# EAGLE board MOL-v1.2b (EAGLE 8.2.2)
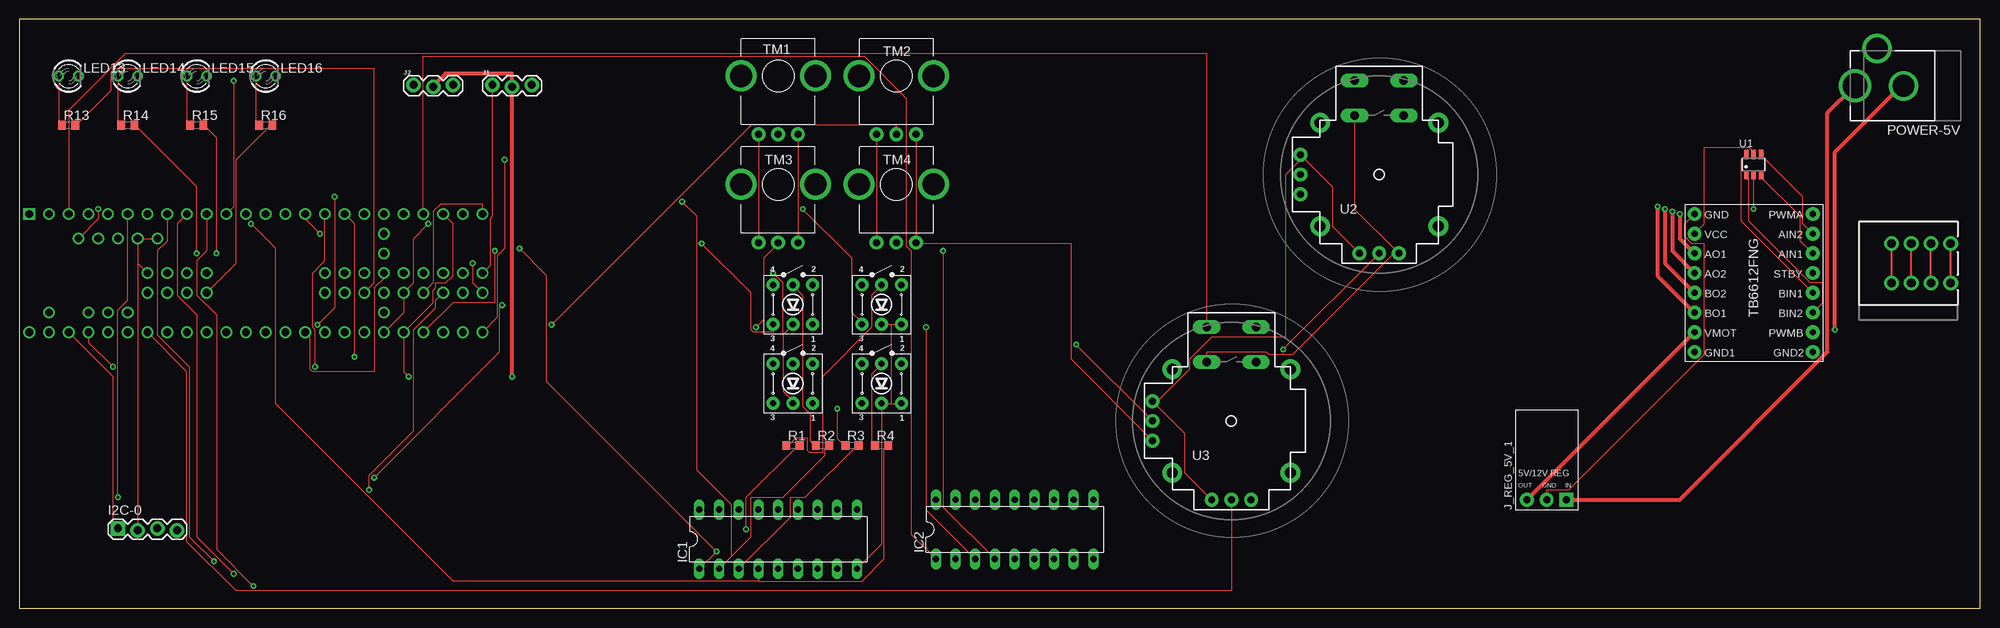
[diagram p0: board, top side]
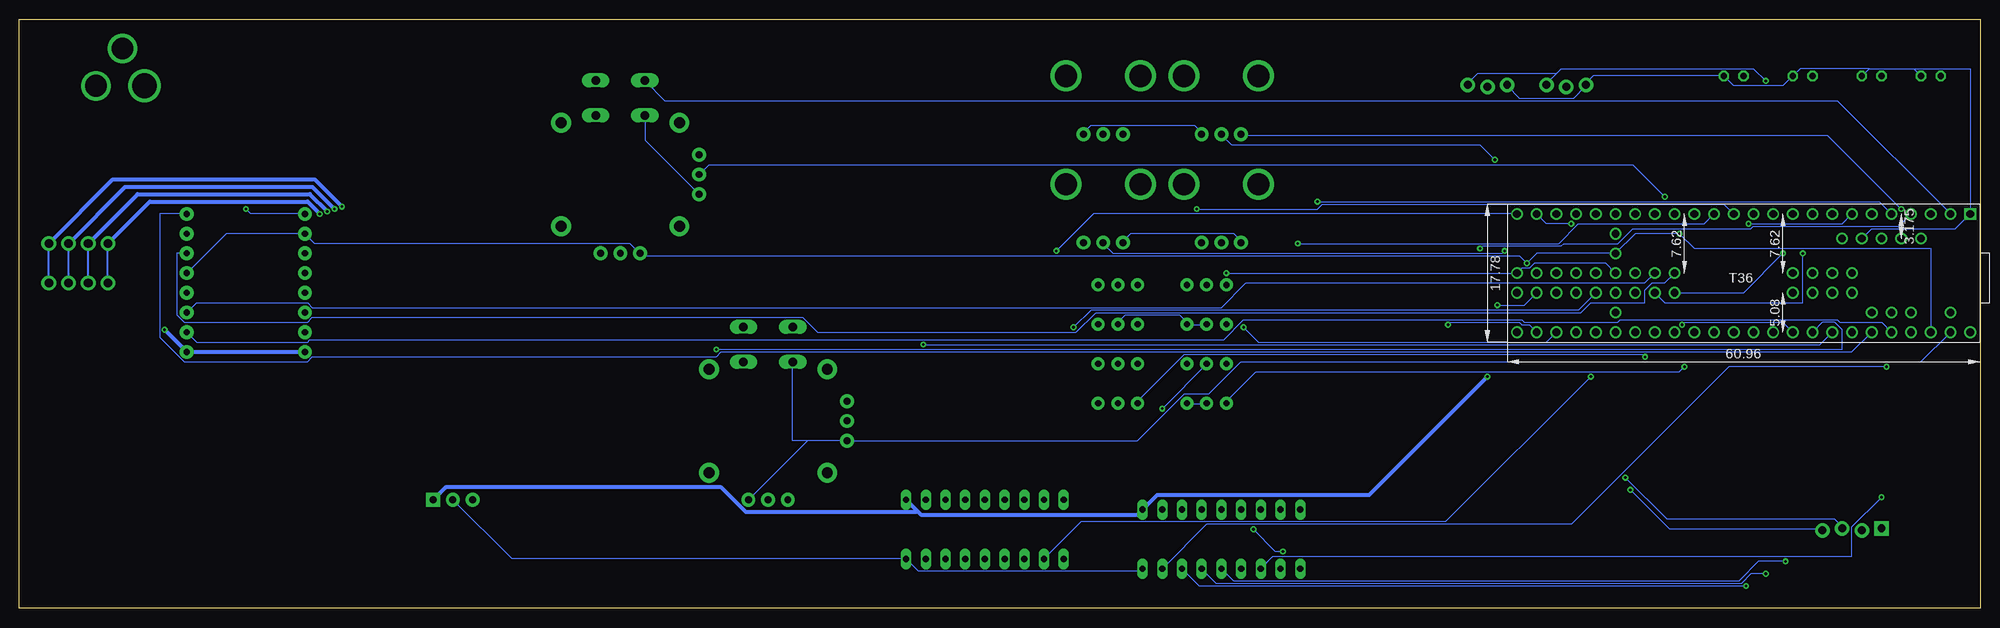
[diagram p1: board, bottom side, seen from below]

Size 252.71 x 75.87 mm. Coordinates in mm from the lower left corner, seen from the top.
Outline: 0,0 252.71,0 252.71,75.87 0,75.87 0,0
Copper layers (1*16): Top 0.035mm / dielectric 1.5mm / Bottom 0.035mm
Design rules "default": minimum track width 6mil, minimum drill 0.35mm, track to track 6mil, track to pad 6mil, pad to pad 6mil, via to via 6mil, smd to smd 6mil, copper to edge 40mil, drill to drill 6mil, minimum pad ring 10mil, minimum via ring 8mil, stop-mask expansion 4mil, vias tented up to drill 0mil, thermal gap 10mil
Net classes: 2 Power: width 0.508 mm, clearance 0.152 mm

## Footprints (pad centres in the part's own frame; a part is rotated, then mirrored left to right if it is on the bottom)
1X04_LOCK = drill 1.016 pad 1.88 square: 1 0,0.127 | drill 1.016 pad 1.88: 2 2.54,-0.127; 3 5.08,0.127; 4 7.62,-0.127
DIL18 = drill 0.813 long: 1 -10.16,-3.81; 2 -7.62,-3.81; 3 -5.08,-3.81; 4 -2.54,-3.81; 5 0,-3.81; 6 2.54,-3.81; 7 5.08,-3.81; 8 7.62,-3.81; 9 10.16,-3.81; 10 10.16,3.81; 11 7.62,3.81; 12 5.08,3.81; 13 2.54,3.81; 14 0,3.81; 15 -2.54,3.81; 16 -5.08,3.81; 17 -7.62,3.81; 18 -10.16,3.81
1X03_LOCK = drill 1.016 pad 1.88: 1 0,0.127; 2 2.54,-0.127; 3 5.08,0.127
POLOLU_5V-12V_STEPUP_U3V12F5-U3V12F12 = drill 0.9 pad 1.778: GND 0,-6.35; VOUT -2.54,-6.35 | drill 0.9 pad 1.778 square: VIN 2.54,-6.35
LED3MM = drill 0.813 octagon: A -1.27,0; K 1.27,0
SPRINGTERMINAL-2.54MM-4 = drill 1.1 pad 1.9: 1 7.62,-2.54; 2 5.08,-2.54; 3 2.54,-2.54; 4 0,-2.54; P$1 7.62,2.54; P$2 5.08,2.54; P$3 2.54,2.54; P$4 0,2.54
DCJACK_2MM_PTH = drill 2.8: GND 0,7.35; GNDBREAK 4.8,10.75 | drill 3.2: PWR 0,13.6
R0603 = smd 1 x 1.1: 1 -0.85,0; 2 0.85,0
TR2-SWITCH-MOMENTARY-LED = drill 0.8 pad 1.676: 1 2.54,-2.54; 2 2.54,2.54; 3 -2.54,-2.54; 4 -2.54,2.54; A 0,2.54; C 0,-2.54
TRIM-PCB-9MM = drill 0.9 pad 1.778: 1 -2.54,-7.5; 2 0,-7.5; 3 2.54,-7.5 | drill 2.845 pad 4: 5 -4.8,0; 6 -4.8,0; M1 -4.8,0; M2 4.8,0
SOT23-6 = smd 0.55 x 1.2: 1 -0.95,-1.3; 2 0,-1.3; 3 0.95,-1.3; 4 0.95,1.3; 5 0,1.3; 6 -0.95,1.3
JOYSTICK = drill 1.1 pad 1.778 long: B1A -3.175,12.12; B1B 3.175,12.12; B2A -3.175,7.62; B2B 3.175,7.62 | drill 0.889 pad 1.778: H1 -2.54,-10.16; H2 0,-10.16; H3 2.54,-10.16; V1 -10.16,2.54; V2 -10.16,0; V3 -10.16,-2.54 | drill 1.397 pad 2.54: MOUNT1 -7.62,6.668; MOUNT2 -7.62,-6.668; MOUNT3 7.62,-6.668; MOUNT4 7.62,6.668
T36 = drill 1: 0 -15.24,-5.08; 1 -12.7,-5.08; 2 -10.16,-5.08; 3 -7.62,-5.08; 3V3(1) 17.78,-5.08; 3V3(2) 27.94,0; 3V3(3) -12.7,10.16; 3V3(4) 40.64,5.08; 4 -5.08,-5.08; 5 -2.54,-5.08; 5V -11.43,-1.905; 6 0,-5.08; 7 2.54,-5.08; 8 5.08,-5.08; 9 7.62,-5.08; 10 10.16,-5.08; 11 12.7,-5.08; 12 15.24,-5.08; 13 15.24,10.16; 14 12.7,10.16; 15 10.16,10.16; 16 7.62,10.16; 17 5.08,10.16; 18 2.54,10.16; 19 0,10.16; 20 -2.54,10.16; 21 -5.08,10.16; 22 -7.62,10.16; 23 -10.16,10.16; 24 20.32,-5.08; 25 22.86,-5.08; 26 25.4,-5.08; 27 27.94,-5.08; 28 30.48,-5.08; 29 33.02,-5.08; 30 35.56,-5.08; 31 38.1,-5.08; 32 40.64,-5.08; 33 40.64,10.16; 34 38.1,10.16; 35 35.56,10.16; 36 33.02,10.16; 37 30.48,10.16; 38 27.94,10.16; 39 25.4,10.16; 40 20.32,2.54; 41 22.86,2.54; 42 25.4,2.54; 43 30.48,2.54; 44 33.02,2.54; 45 35.56,2.54; 46 38.1,2.54; 47 38.1,5.08; 48 35.56,5.08; 49 33.02,5.08; 50 30.48,5.08; 51 25.4,5.08; 52 22.86,5.08; 53 20.32,5.08; 54 5.08,5.08; 55 2.54,5.08; 56 0,5.08; 57 -2.54,5.08; A10 -7.62,7.62; A11 -5.08,7.62; AGND -15.24,10.16; AREF -10.16,7.62; D+ -6.35,-1.905; D- -8.89,-1.905; DAC0 22.86,10.16; DAC1 20.32,10.16; DC 2.54,2.54; DD 5.08,2.54; DE 0,2.54; G1 27.94,2.54; G2 17.78,10.16; G3 40.64,2.54; G4 -3.81,-1.905; G5 -1.27,-1.905; G6 -2.54,2.54; P 27.94,5.08; R 27.94,7.62; VBAT 27.94,-2.54; VIN -17.78,10.16; VUSB -15.24,7.62 | drill 1 square: G0 -17.78,-5.08
POLOLU_TB6612FNG = drill 0.8 pad 1.778: AIN1 7.62,3.81; AIN2 7.62,6.35; AO1 -7.62,3.81; AO2 -7.62,1.27; BIN1 7.62,-1.27; BIN2 7.62,-3.81; BO1 -7.62,-3.81; BO2 -7.62,-1.27; GND -7.62,8.89; GND1 -7.62,-8.89; GND2 7.62,-8.89; PWMA 7.62,8.89; PWMB 7.62,-6.35; STBY 7.62,1.27; VCC -7.62,6.35; VMOT -7.62,-6.35

## Placement (x,y rotation side)
I2C-0  [1X04_LOCK]  12.7,10.16 0 top
IC1  ULN2803  [DIL18]  97.79,8.89 0 top
IC2  ULN2803  [DIL18]  128.27,10.16 0 top
J1  [1X03_LOCK]  60.96,67.31 0 top
J2  [1X03_LOCK]  50.8,67.31 0 top
J_REG_5V_1  POLOLU_VOLTAGE_REGULATORS_3PIN  [POLOLU_5V-12V_STEPUP_U3V12F5-U3V12F12]  196.85,20.32 0 top
LED13  [LED3MM]  6.35,68.58 0 top
LED14  [LED3MM]  13.97,68.58 0 top
LED15  [LED3MM]  22.86,68.58 0 top
LED16  [LED3MM]  31.75,68.58 0 top
MOTORS1  [SPRINGTERMINAL-2.54MM-4]  241.3,44.45 0 top
POWER-5V  [DCJACK_2MM_PTH]  250.19,67.31 90 top
R1  [R0603]  99.69,20.95 0 top
R2  [R0603]  103.5,20.95 0 top
R3  [R0603]  107.31,20.95 0 top
R4  [R0603]  111.12,20.95 0 top
R13  [R0603]  6.35,62.23 0 top
R14  [R0603]  13.97,62.23 0 top
R15  [R0603]  22.86,62.23 0 top
R16  [R0603]  31.75,62.23 0 top
S1  SW-LEDPTH  [TR2-SWITCH-MOMENTARY-LED]  111.12,39.12 0 top
S2  SW-LEDPTH  [TR2-SWITCH-MOMENTARY-LED]  99.69,39.12 0 top
S3  SW-LEDPTH  [TR2-SWITCH-MOMENTARY-LED]  99.69,28.96 0 top
S4  SW-LEDPTH  [TR2-SWITCH-MOMENTARY-LED]  111.12,28.96 0 top
TM1  [TRIM-PCB-9MM]  97.79,68.58 0 top
TM2  [TRIM-PCB-9MM]  113.03,68.58 0 top
TM3  [TRIM-PCB-9MM]  97.79,54.61 0 top
TM4  [TRIM-PCB-9MM]  113.03,54.61 0 top
U1  SN74LVC2G04DBV  [SOT23-6]  223.52,57.15 0 top
U2  JOYSTICKPTH  [JOYSTICK]  175.26,55.88 0 top
U3  JOYSTICKPTH  [JOYSTICK]  156.21,24.13 0 top
U$1  TEENSY3_6--ALLPINS  [T36]  19.05,45.72 180 bottom
U$7  POLOLU_TB6612FNG  [POLOLU_TB6612FNG]  223.52,41.91 0 top

## Library data of the parts
I2C-0 J_REG_5V_1 MOTORS1 R1-R4 R13-R16 U$7 = CMU-ArtFab
IC1 IC2 = uln-udn
J1 J2 = SparkFun-Connectors
LED13-LED16 = led
POWER-5V U2 U3 = adafruit
S1-S4 TM1-TM4 = Daniel
U1 = 74LV
U$1 = Teensy_3_6

## Nets
+3V3: I2C-0.1 U1.5 U2.H1 U2.V1 U3.H1 U3.V1 U$1.3V3(1) U$1.3V3(2) U$1.3V3(3) U$1.3V3(4) U$7.STBY U$7.VCC
+5V [Power]: IC1.10 IC2.10 J1.2 J2.2 J_REG_5V_1.VIN POWER-5V.PWR
A1: TM1.2 U$1.33
A2: TM2.2 U$1.34
A3: TM3.2 U$1.35
A4: TM4.2 U$1.36
A5: U$1.39
A6: U$1.DAC0
A7: U$1.DAC1
A8: U$1.A10
A9: U$1.A11
A10: U$1.14
A11: U$1.15
A12: U$1.16
AGND: TM1.3 TM2.3 TM3.3 TM4.3 U2.B2A U2.H3 U2.V3 U3.B2A U3.H3 U3.V3 U$1.AGND
B1: S1.3 U$1.11
B2: S2.3 U$1.12
B3: S3.3 U$1.24
B4: S4.3 U$1.25
B5: U$1.26
B6: U$1.27
B7: U$1.28
B8: U$1.42
B9: U$1.43
B10: U$1.44
B11: U$1.45
B12: U$1.46
GND: I2C-0.2 IC1.9 IC2.9 J1.1 J2.1 J_REG_5V_1.GND LED13.K LED14.K LED15.K LED16.K S1.1 S1.C S2.1 S2.C S3.1 S3.C S4.1 S4.C U1.2 U$1.G0 U$1.G1 U$1.G2 U$1.G3 U$1.G4 U$1.G5 U$1.G6 U$7.GND
GND_MOT [Power]: POWER-5V.GND U$7.GND1 U$7.GND2
GNDBREAK: POWER-5V.GNDBREAK
I2C_SCL: I2C-0.3 U$1.47
I2C_SDA: I2C-0.4 U$1.48
L1: IC1.1 R1.2 U$1.2
L2: IC1.2 R2.2 U$1.3
L3: IC1.3 R3.2 U$1.4
L4: IC1.4 R4.2 U$1.5
L5: IC1.5 U$1.6
L6: IC1.6 U$1.7
L7: IC1.7 U$1.8
L8: IC1.8 U$1.23
L9: IC2.1 U$1.29
L10: IC2.2 U$1.30 U$1.37
L11: IC2.3 U$1.31 U$1.38 U$1.50
L12: IC2.4 U$1.32 U$1.49
L13: IC2.5
L14: IC2.6
L15: IC2.7
L16: IC2.8
LED1: IC1.18
LED2: IC1.17
LED3: IC1.16
LED4: IC1.15
LED5: IC1.14
LED6: IC1.13
LED7: IC1.12
LED8: IC1.11
LED9: IC2.18
LED10: IC2.17
LED11: IC2.16
LED12: IC2.15
LED13: IC2.14
LED14: IC2.13
LED15: IC2.12
LED16: IC2.11
M_AIN: U1.3 U$1.40 U$7.AIN1
M_BIN: U1.1 U$1.41 U$7.BIN2
M_JOYB: U2.B1A U$1.0
M_JOYH: U2.H2 U$1.18
M_JOYV: U2.V2 U$1.17
M_PWMA: U$1.21 U$7.PWMA
M_PWMB: U$1.22 U$7.PWMB
N$1: R1.1 S1.A
N$2: LED13.A R13.1
N$3: LED14.A R14.1
N$4: LED15.A R15.1
N$5: U1.6 U$7.BIN1
N$6: U1.4 U$7.AIN2
N$7: LED16.A R16.1
N$8: R2.1 S2.A
N$9: R3.1 S3.A
N$10: R4.1 S4.A
N$45 [Power]: MOTORS1.P$1 U$7.BO1
N$46 [Power]: MOTORS1.P$2 U$7.BO2
N$52 [Power]: MOTORS1.P$3 U$7.AO2
N$54 [Power]: MOTORS1.P$4 U$7.AO1
S1: J1.3 J2.3 U$1.9
S2: U$1.10
S_JOYB: U3.B1A U$1.1
S_JOYH: U3.H2 U$1.20
S_JOYV: U3.V2 U$1.19
U1: R13.2 U$1.51
U2: R14.2 U$1.52
U3: R15.2 U$1.53
U4: R16.2 U$1.54
VCC: TM1.1 TM2.1 TM3.1 TM4.1 U$1.5V
VMOT [Power]: J_REG_5V_1.VOUT U$7.VMOT

## Tracks (layer width: path | path; a pad name or v marks a point on that pad's centre or on a via)
+3V3  (via drill 0.35)
  Top 0.152: U$1.3V3(3) 12.06,29.84 12.06,11.11 12.7,10.48 I2C-0.1 | v38.73,48.26 36.83,50.16 U$1.3V3(1) | U$1.3V3(4) 58.42,41.91 v58.42,44.45 | U$7.VCC 217.17,49.53 217.17,59.37 222.88,59.37 223.52,58.74 U1.5 | U3.H1 150.18,17.46 150.18,22.54 146.37,26.35 | U2.H1 169.23,49.21 169.23,54.29 165.42,58.1 | 146.37,26.35 150.81,30.8 150.81,32.07 153.67,34.92 163.19,34.92 163.19,55.88 165.42,58.1 | 146.37,26.35 U3.V1 | 165.42,58.1 U2.V1
  Bottom 0.152: U$1.3V3(3) 6.35,46.35 36.83,46.35 v38.73,48.26 44.45,48.26 U$1.3V3(2) 57.15,45.72 v58.42,44.45 59.37,45.4 172.4,45.4 U2.H1 173.99,46.99 214.63,46.99 U$7.VCC 226.06,48.26 U$7.STBY
+5V  (via drill 0.35)
  Top 0.508: J2.2 53.34,67.31 54.93,68.9 63.5,68.9 J1.2 v63.5,29.84 | J_REG_5V_1.VIN 214,13.97 233.04,33.02 233.04,63.82 236.54,67.31 POWER-5V.PWR
  Bottom 0.508: IC2.10 137,12.54 | 137,12.54 136.53,12.06 108.58,12.06 IC1.10 106.05,14.61 78.74,14.61 v63.5,29.84 | J_REG_5V_1.VIN 197.8,15.56 162.24,15.56 159.07,12.38 137.16,12.38 137,12.54
A1  (via drill 0.35)
  Top 0.152: U$1.33 61.59,37.47 61.59,45.4 62.55,46.35 v62.55,57.78
  Bottom 0.152: v62.55,57.78 64.45,59.69 96.52,59.69 97.79,60.96 TM1.2
A2  (via drill 0.35)
  Top 0.152: v68.58,36.51 94.3,62.23 113.03,62.23 TM2.2
  Bottom 0.152: U$1.34 58.1,36.51 59.05,36.51 59.37,36.83 68.26,36.83 v68.58,36.51
A3  (via drill 0.35)
  Top 0.152: v94.93,36.2 95.89,37.15 95.89,45.09 97.79,46.99 TM3.2
  Bottom 0.152: U$1.35 55.88,34.29 93.03,34.29 v94.93,36.2
A4  (via drill 0.35)
  Top 0.152: U$1.36 55.88,39.37 61.28,39.37 v61.28,46.04
  Bottom 0.152: v61.28,46.04 61.59,45.72 111.76,45.72 113.03,46.99 TM4.2
AGND
  Top 0.152: 177.48,46.04 172.09,51.44 U2.B2A | TM1.3 TM3.3 | TM2.3 TM4.3 115.57,46.99 135.57,46.99 135.57,32.07 U3.V3 | 177.48,46.04 164.15,32.7 160.97,32.7 160.66,33.02 153.03,33.02 U3.B2A | 177.48,46.04 U2.H3
  Bottom 0.152: U2.V3 172.09,60.33 U2.B2A | TM1.3 100.33,61.28 101.28,62.23 114.62,62.23 115.57,61.28 TM2.3 | U$1.AGND 7.62,31.75 95.25,31.75 99.38,27.62 102.55,27.62 108.58,21.59 U3.V3 151.13,21.59 | 151.13,21.59 U3.H3 | U3.B2A 153.03,21.59 151.13,21.59
B1  (via drill 0.35)
  Top 0.152: v100.97,51.44 107.31,45.09 107.31,38.1 108.58,36.83 S1.3
  Bottom 0.152: U$1.11 33.02,52.07 84.77,52.07 85.41,51.44 v100.97,51.44
B2  (via drill 0.35)
  Top 0.152: v87.95,46.99 94.3,40.64 94.3,35.88 94.61,35.56 97.16,35.56 S2.3
  Bottom 0.152: U$1.12 35.56,49.53 51.75,49.53 54.29,46.99 v87.95,46.99
B3  (via drill 0.35)
  Top 0.152: U$1.24 39.37,44.77 37.78,43.18 37.78,36.2 38.1,35.88 v38.1,31.11
  Bottom 0.152: v38.1,31.11 38.73,30.48 93.34,30.48 97.16,26.67 S3.3
B4  (via drill 0.35)
  Top 0.152: U$1.25 43.18,49.53 v43.18,32.38
  Bottom 0.152: v43.18,32.38 43.5,32.7 102.55,32.7 108.58,26.67 S4.3
GND  (via drill 0.35)
  Top 0.152: 15.24,44.45 U$1.G6 | 15.24,44.45 U$1.G4 U$1.G5 | 15.24,44.45 I2C-0.2 | U$1.G2 37.47,34.92 37.47,30.8 37.78,30.48 45.72,30.48 45.72,41.27 46.99,42.55 U$1.G1 | U$1.G3 60.64,44.13 60.64,50.16 60.96,50.48 J1.1 | 98.42,35.24 98.42,27.94 99.69,26.67 S3.C | 98.42,35.24 99.69,36.51 S2.C | v223.52,51.44 U1.2 | 112.39,36.51 113.67,36.51 S1.1 | 112.39,36.51 111.12,36.51 S1.C | IC1.9 111.12,8.26 111.12,26.35 | 111.12,26.35 112.39,26.35 | 112.39,26.35 113.67,26.35 S4.1 | 111.12,26.35 S4.C | 112.39,26.35 112.39,36.51 | U$7.GND 214.63,49.53 214.63,47.94 215.58,46.99 217.17,46.99 217.17,32.7 199.71,15.24 196.85,15.24 J_REG_5V_1.GND | v97.16,43.18 98.42,41.91 98.42,35.24
  Bottom 0.152: U$1.G4 13.97,48.9 3.17,48.9 U$1.G0 1.27,69.53 8.57,69.53 | U$1.G1 48.26,44.45 57.47,44.45 58.1,43.81 59.05,43.81 U$1.G3 v97.16,43.18 | J1.1 60.96,67.31 59.37,65.72 52.39,65.72 50.8,67.31 J2.1 50.8,67.63 49.85,68.58 LED16.K 31.75,67.31 25.4,67.31 LED15.K 23.18,69.53 14.29,69.53 | 8.57,69.53 LED13.K | 14.29,69.53 8.57,69.53 | LED14.K 14.29,69.53 | S3.C 99.69,26.35 102.23,26.35 S3.1 | S2.C 99.69,36.51 102.23,36.51 S2.1 102.23,36.83 103.19,37.78 110.17,37.78 111.12,36.83 S1.C | v223.52,51.44 222.88,50.8 U$7.GND | IC1.9 108.27,4.76 136.84,4.76 IC2.9 189.23,6.35 J_REG_5V_1.GND
GND_MOT  (via drill 0.35)
  Top 0.508: v234,35.88 234,58.74 242.57,67.31 POWER-5V.GND
  Bottom 0.508: U$7.GND1 U$7.GND2 v234,35.88
I2C_SCL  (via drill 0.35)
  Top 0.152: v62.23,39.05 61.91,38.73 61.91,33.02 v45.72,16.83
  Bottom 0.152: U$1.47 58.74,39.05 v62.23,39.05 | v45.72,16.83 40.32,11.43 18.73,11.43 17.78,10.48 I2C-0.3
I2C_SDA  (via drill 0.35)
  Top 0.152: U$1.48 53.66,39.69 53.66,38.73 50.8,35.88 50.8,22.86 45.09,17.14 v45.09,15.24
  Bottom 0.152: v45.09,15.24 40.01,10.16 20.32,10.16 I2C-0.4
L1  (via drill 0.35)
  Top 0.152: v93.66,10.16 93.66,14.29 100.33,20.95 R1.2 | IC1.1 v89.85,7.3 67.94,29.21 67.94,42.86 v64.45,46.35
  Bottom 0.152: v93.66,10.16 90.81,7.3 v89.85,7.3 | U$1.2 10.48,49.21 29.21,49.21 29.53,48.9 44.77,48.9 46.67,46.99 53.66,46.99 53.98,46.67 64.14,46.67 v64.45,46.35
L2  (via drill 0.35)
  Top 0.152: IC1.2 91.76,6.67 | 91.76,6.67 94.3,9.21 94.3,14.29 98.42,14.29 103.82,19.68 103.82,20.64 104.14,20.95 R2.2 | v85.41,52.39 87.31,50.48 87.31,17.78 91.76,13.34 91.76,6.67
  Bottom 0.152: U$1.3 13.02,52.39 v85.41,52.39
L3  (via drill 0.35)
  Top 0.152: IC1.3 99.38,11.75 99.38,14.29 101.28,14.29 107.95,20.95 R3.2 | U$1.4 13.97,39.69 12.7,38.42 v12.7,14.29
  Bottom 0.152: v12.7,14.29 16.51,10.48 16.51,6.67 91.12,6.67 IC1.3
L4  (via drill 0.35)
  Top 0.152: 95.25,3.49 108.58,3.49 111.44,6.35 111.44,20.64 111.76,20.95 R4.2 | IC1.4 95.25,3.49 | v29.84,49.53 33.02,46.35 33.02,26.35 55.88,3.49 95.25,3.49
  Bottom 0.152: U$1.5 17.78,49.53 v29.84,49.53
L5  (via drill 0.35)
  Top 0.152: v25.08,6.03 21.91,9.21 21.91,31.11 17.78,35.24 17.78,46.04 19.05,47.31 U$1.6
  Bottom 0.152: IC1.5 96.2,3.49 31.11,3.49 28.57,6.03 v25.08,6.03
L6  (via drill 0.35)
  Top 0.152: v27.62,4.45 22.86,9.21 22.86,37.78 20.32,40.32 20.32,49.53 U$1.7
  Bottom 0.152: IC1.6 98.42,3.17 30.8,3.17 29.53,4.45 v27.62,4.45
L7  (via drill 0.35)
  Top 0.152: v30.16,2.86 25.4,7.62 25.4,37.78 22.86,40.32 22.86,44.77 24.13,46.04 U$1.8
  Bottom 0.152: IC1.7 100.65,2.86 v30.16,2.86
L8  (via drill 0.35)
  Top 0.152: v12.06,31.11 8.89,34.29 U$1.23
  Bottom 0.152: IC1.8 99.69,10.79 52.7,10.79 32.38,31.11 v12.06,31.11
L9
  Top 0.152: IC2.1 114.94,9.53 114.94,46.04 114.3,46.67 114.3,65.72 108.9,71.12 52.07,71.12 U$1.29
L10  (via drill 0.35)
  Top 0.152: v50.16,29.84 49.53,30.48 U$1.37 53.34,39.37 53.34,40.96 53.66,41.27 53.66,41.91 54.93,41.91 55.88,42.86 55.88,49.53 U$1.30
  Bottom 0.152: IC2.2 115.89,11.11 68.9,11.11 v50.16,29.84
L11  (via drill 0.35)
  Top 0.152: IC2.3 116.84,12.7 v116.84,36.2 | U$1.38 49.53,38.1 U$1.50 50.8,41.91 50.8,47.62 v52.7,49.53
  Bottom 0.152: v116.84,36.2 114.62,38.42 51.75,38.42 U$1.50 | U$1.31 55.88,49.53 v52.7,49.53
L12  (via drill 0.35)
  Top 0.152: IC2.4 119.06,13.02 v119.06,46.04 | U$1.49 53.34,41.91 53.34,51.12 54.29,52.07 59.69,52.07 U$1.32
  Bottom 0.152: v119.06,46.04 114.3,50.8 U$1.32
M_AIN
  Top 0.152: U$7.AIN1 229.55,47.31 229.55,50.48 224.47,55.56 U1.3
  Bottom 0.152: U$1.40 40.64,41.91 42.23,41.91 43.18,40.96 43.18,39.37 50.16,39.37 51.44,38.1 113.98,38.1 116.52,35.56 149.86,35.56 151.76,37.47 214.95,37.47 215.58,36.83 231.46,36.83 232.41,37.78 232.41,45.72 U$7.AIN1
M_BIN
  Top 0.152: U$7.BIN2 232.41,39.37 232.41,41.91 230.82,41.91 222.88,49.85 222.88,55.24 222.57,55.56 U1.1
  Bottom 0.152: U$1.41 43.18,41.91 94.61,41.91 97.79,38.73 214.95,38.73 215.58,39.37 229.87,39.37 U$7.BIN2
M_JOYB
  Bottom 0.152: U$1.0 18.41,65.41 169.54,65.41 172.09,67.94 U2.B1A
M_JOYH  (via drill 0.35)
  Top 0.152: U2.H2 v162.88,33.34
  Bottom 0.152: U$1.18 20.32,36.83 18.73,36.83 17.78,35.88 17.78,33.34 v162.88,33.34
M_JOYV  (via drill 0.35)
  Top 0.152: v38.42,36.51 40.64,38.73 v40.64,53.02
  Bottom 0.152: U$1.17 25.4,36.83 38.1,36.83 v38.42,36.51 | v40.64,53.02 44.77,57.15 163.83,57.15 U2.V2
M_PWMA
  Bottom 0.152: U$1.21 16.51,33.02 162.24,33.02 162.88,32.38 214.95,32.38 215.58,31.75 231.46,31.75 234.63,34.92 234.63,50.8 U$7.PWMA
M_PWMB
  Bottom 0.152: U$1.22 12.7,36.83 18.1,36.83 18.41,37.15 46.35,37.15 46.67,36.83 58.74,36.83 59.05,37.15 94.93,37.15 97.47,34.61 215.26,34.61 215.58,34.29 229.87,34.29 U$7.PWMB
N$1
  Top 0.152: R1.1 99.06,20.95 100.01,21.91 101.6,21.91 101.6,20.32 101.92,20 103.5,20 103.5,29.84 109.86,36.2 109.86,40.32 111.12,41.59 S1.A
N$2
  Top 0.152: LED13.A 5.08,62.55 5.4,62.23 R13.1
N$3
  Top 0.152: LED14.A 12.7,62.55 13.02,62.23 R14.1
N$4
  Top 0.152: LED15.A 21.59,62.55 21.91,62.23 R15.1
N$5
  Top 0.152: U$7.BIN1 221.93,49.85 221.93,57.78 222.57,58.42 U1.6
N$6
  Top 0.152: U$7.AIN2 229.87,49.53 229.87,53.02 224.47,58.42 U1.4
N$7
  Top 0.152: LED16.A 30.48,62.55 30.8,62.23 R16.1
N$8
  Top 0.152: R2.1 102.55,20.95 101.92,21.59 101.92,25.08 100.97,26.04 100.97,40.32 99.69,41.59 S2.A
N$9  (via drill 0.35)
  Top 0.152: v105.41,25.72 105.41,21.91 106.36,20.95 R3.1
  Bottom 0.152: v105.41,25.72 99.69,31.43 S3.A
N$10
  Top 0.152: R4.1 110.17,20.95 109.86,21.27 109.86,30.16 111.12,31.43 S4.A
N$45  (via drill 0.35)
  Top 0.508: U$7.BO1 211.14,42.86 v211.14,51.75
  Bottom 0.508: v211.14,51.75 214.63,55.24 240.66,55.24 MOTORS1.P$1
N$46  (via drill 0.35)
  Top 0.508: U$7.BO2 212.09,44.45 v212.09,51.44
  Bottom 0.508: v212.09,51.44 214.95,54.29 239.08,54.29 MOTORS1.P$2
N$52  (via drill 0.35)
  Top 0.508: U$7.AO2 213.04,46.04 v213.04,51.12
  Bottom 0.508: v213.04,51.12 215.26,53.34 237.49,53.34 MOTORS1.P$3
N$54  (via drill 0.35)
  Top 0.508: U$7.AO1 214,47.62 v214,50.8
  Bottom 0.508: v214,50.8 215.58,52.39 235.9,52.39 MOTORS1.P$4
S1  (via drill 0.35)
  Top 0.152: U$1.9 27.62,51.75 v27.62,67.94
  Bottom 0.152: v27.62,67.94 29.21,69.53 53.98,69.53 54.61,68.9 | 54.61,68.9 55.88,67.63 J2.3 | 54.61,68.9 64.77,68.9 66.04,67.63 J1.3
S_JOYB
  Top 0.152: U$1.1 6.35,64.14 13.65,71.44 153.03,71.44 U3.B1A
S_JOYH
  Top 0.152: U$1.20 21.59,30.48 21.59,8.57 27.94,2.22 156.21,2.22 U3.H2
S_JOYV  (via drill 0.35)
  Top 0.152: U3.V2 v136.21,33.97
  Bottom 0.152: U$1.19 20.64,33.97 v136.21,33.97
U1
  Top 0.152: U$1.51 45.72,41.91 45.72,69.53 12.38,69.53 11.75,68.9 11.75,66.67 7.3,62.23 R13.2
U2  (via drill 0.35)
  Top 0.152: v22.86,45.72 22.86,54.29 14.92,62.23 R14.2
  Bottom 0.152: v22.86,45.72 22.86,39.37 40.64,39.37 U$1.52
U3  (via drill 0.35)
  Top 0.152: v25.4,45.72 25.4,60.64 23.81,62.23 R15.2
  Bottom 0.152: v25.4,45.72 30.48,40.64 U$1.53
U4
  Top 0.152: U$1.54 27.94,44.45 27.94,57.78 32.38,62.23 R16.2
VCC  (via drill 0.35)
  Top 0.152: TM2.1 TM4.1 | U$1.5V 10.16,50.16 v10.16,51.44 | TM1.1 TM3.1
  Bottom 0.152: v10.16,51.44 19.68,60.96 95.25,60.96 TM1.1 | TM4.1 110.49,47.31 109.54,48.26 96.2,48.26 95.25,47.31 TM3.1
VMOT
  Top 0.508: U$7.VMOT J_REG_5V_1.VOUT

## Text on the board
Top: ***The TEENSY is on the BOTTOM side of the board; / / KNOBS and BUTTONS are on the TOP side of the board.